# Altium PCB PCB2.PcbDoc (part 2 of 3)
Units mil, origin at the board's own origin, x right, y up, seen from the top; angles counter-clockwise.
Board outline 6000 x 4000 mil, 2 copper layers (Top Layer, Bottom Layer); 202 components, 201 nets, 407 pads, 100 vias.
Unrouted connection lines stored in the file: 105.
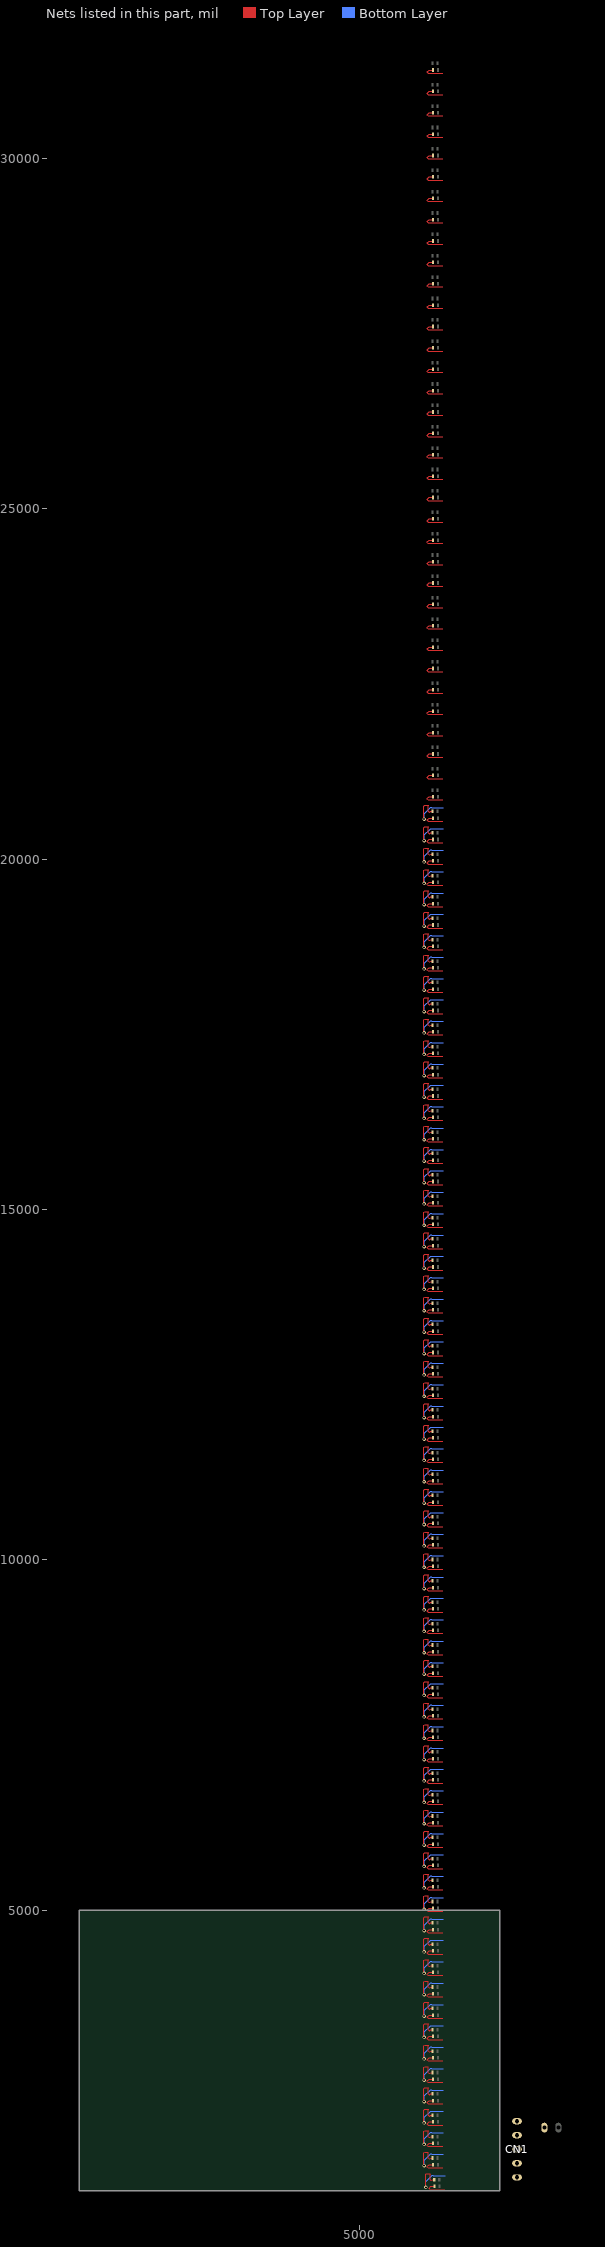
[diagram p2: the nets of this part, all layers, seen from the top]

## Part data
CN1: "Terminal Block"
CN?: library part TB-02, "Terminal Block"
D1_Out1 D1_Out2 D1_Out3 D1_Out4 D1_Out5 D1_Out6 D1_Out7 D1_Out8 D1_Out9 D1_Out10 D1_Out11 D1_Out12 D1_Out13 D1_Out14 D1_Out15 D1_Out16 D1_Out17 D1_Out18 D1_Out19 D1_Out20 D1_Out21 D1_Out22 D1_Out23 D1_Out24 D1_Out25 D1_Out26 D1_Out27 D1_Out28 D1_Out29 D1_Out30 D1_Out31 D1_Out32 D1_Out33 D1_Out34 D1_Out35 D1_Out36 D1_Out37 D1_Out38 D1_Out39 D1_Out40 D1_Out41 D1_Out42 D1_Out43 D1_Out44 D1_Out45 D1_Out46 D1_Out47 D1_Out48 D1_Out49 D1_Out50 D1_Out51 D1_Out52 D1_Out53 D1_Out54 D1_Out55 D1_Out56 D1_Out57 D1_Out58 D1_Out59 D1_Out60 D1_Out61 D1_Out62 D1_Out63 D1_Out64 D1_Out65 D1_Out66 D1_Out67 D1_Out68 D1_Out69 D1_Out70 D1_Out71 D1_Out72 D1_Out73 D1_Out74 D1_Out75 D1_Out76 D1_Out77 D1_Out78 D1_Out79 D1_Out80 D1_Out81 D1_Out82 D1_Out83 D1_Out84 D1_Out85 D1_Out86 D1_Out87 D1_Out88 D1_Out89 D1_Out90 D1_Out91 D1_Out92 D1_Out93 D1_Out94 D1_Out95 D1_Out96 D1_Out97 D1_Out98 D1_Out99 D1_Out100: "LED - Light-Emitting Diode"
R1_Out1 R1_Out2 R1_Out3 R1_Out4 R1_Out5 R1_Out6 R1_Out7 R1_Out8 R1_Out9 R1_Out10 R1_Out11 R1_Out12 R1_Out13 R1_Out14 R1_Out15 R1_Out16 R1_Out17 R1_Out18 R1_Out19 R1_Out20 R1_Out21 R1_Out22 R1_Out23 R1_Out24 R1_Out25 R1_Out26 R1_Out27 R1_Out28 R1_Out29 R1_Out30 R1_Out31 R1_Out32 R1_Out33 R1_Out34 R1_Out35 R1_Out36 R1_Out37 R1_Out38 R1_Out39 R1_Out40 R1_Out41 R1_Out42 R1_Out43 R1_Out44 R1_Out45 R1_Out46 R1_Out47 R1_Out48 R1_Out49 R1_Out50 R1_Out51 R1_Out52 R1_Out53 R1_Out54 R1_Out55 R1_Out56 R1_Out57 R1_Out58 R1_Out59 R1_Out60 R1_Out61 R1_Out62 R1_Out63 R1_Out64 R1_Out65 R1_Out66 R1_Out67 R1_Out68 R1_Out69 R1_Out70 R1_Out71 R1_Out72 R1_Out73 R1_Out74 R1_Out75 R1_Out76 R1_Out77 R1_Out78 R1_Out79 R1_Out80 R1_Out81 R1_Out82 R1_Out83 R1_Out84 R1_Out85 R1_Out86 R1_Out87 R1_Out88 R1_Out89 R1_Out90 R1_Out91 R1_Out92 R1_Out93 R1_Out94 R1_Out95 R1_Out96 R1_Out97 R1_Out98 R1_Out99 R1_Out100: library part Resistor, "Single resistor", Power=0.125W, Unit price=0.1

## Via types
v1: diameter 50, hole 28, Top Layer to Bottom Layer, 100 vias

## Nets (pads, with @x,y where several pads share a name; then routed paths per layer and width w, separated by ;. In a path a pad name is that pad's centre, name@x,y a point inside that pad or via, vN(x,y) a via of type N, cw(c..) or ccw(c..) an arc to the next point about the centre after c; other vN are vias at no path point)
GND: CN?.1 D1_Out1.1 D1_Out2.1 D1_Out3.1 D1_Out4.1 D1_Out5.1 D1_Out6.1 D1_Out7.1 D1_Out8.1 D1_Out9.1 D1_Out10.1 D1_Out11.1 D1_Out12.1 D1_Out13.1 D1_Out14.1 D1_Out15.1 D1_Out16.1 D1_Out17.1 D1_Out18.1 D1_Out19.1 D1_Out20.1 D1_Out21.1 D1_Out22.1 D1_Out23.1 D1_Out24.1 D1_Out25.1 D1_Out26.1 D1_Out27.1 D1_Out28.1 D1_Out29.1 D1_Out30.1 D1_Out31.1 D1_Out32.1 D1_Out33.1 D1_Out34.1 D1_Out35.1 D1_Out36.1 D1_Out37.1 D1_Out38.1 D1_Out39.1 D1_Out40.1 D1_Out41.1 D1_Out42.1 D1_Out43.1 D1_Out44.1 D1_Out45.1 D1_Out46.1 D1_Out47.1 D1_Out48.1 D1_Out49.1 D1_Out50.1 D1_Out51.1 D1_Out52.1 D1_Out53.1 D1_Out54.1 D1_Out55.1 D1_Out56.1 D1_Out57.1 D1_Out58.1 D1_Out59.1 D1_Out60.1 D1_Out61.1 D1_Out62.1 D1_Out63.1 D1_Out64.1 D1_Out65.1 D1_Out66.1 D1_Out67.1 D1_Out68.1 D1_Out69.1 D1_Out70.1 D1_Out71.1 D1_Out72.1 D1_Out73.1 D1_Out74.1 D1_Out75.1 D1_Out76.1 D1_Out77.1 D1_Out78.1 D1_Out79.1 D1_Out80.1 D1_Out81.1 D1_Out82.1 D1_Out83.1 D1_Out84.1 D1_Out85.1 D1_Out86.1 D1_Out87.1 D1_Out88.1 D1_Out89.1 D1_Out90.1 D1_Out91.1 D1_Out92.1 D1_Out93.1 D1_Out94.1 D1_Out95.1 D1_Out96.1 D1_Out97.1 D1_Out98.1 D1_Out99.1 D1_Out100.1 | length 32262.6
  Top Layer w10: D1_Out2.1@6044.57,1370 5990.43,1370 5965.43,1345 5965.43,1336.72 5977.15,1325 6185.43,1325 ; D1_Out3.1@6044.57,1675 5990.43,1675 5965.43,1650 5965.43,1641.72 5977.15,1630 6185.43,1630 ; D1_Out4.1@6044.57,1980 5990.43,1980 5965.43,1955 5965.43,1946.72 5977.15,1935 6185.43,1935 ; D1_Out5.1@6044.57,2285 5990.43,2285 5965.43,2260 5965.43,2251.72 5977.15,2240 6185.43,2240 ; D1_Out6.1@6044.57,2590 5990.43,2590 5965.43,2565 5965.43,2556.72 5977.15,2545 6185.43,2545 ; D1_Out7.1@6044.57,2895 5990.43,2895 5965.43,2870 5965.43,2861.72 5977.15,2850 6185.43,2850 ; D1_Out8.1@6044.57,3200 5990.43,3200 5965.43,3175 5965.43,3166.72 5977.15,3155 6185.43,3155 ; D1_Out9.1@6044.57,3505 5990.43,3505 5965.43,3480 5965.43,3471.72 5977.15,3460 6185.43,3460 ; D1_Out10.1@6044.57,3810 5990.43,3810 5965.43,3785 5965.43,3776.72 5977.15,3765 6185.43,3765 ; D1_Out11.1@6044.57,4115 5990.43,4115 5965.43,4090 5965.43,4081.72 5977.15,4070 6185.43,4070 ; D1_Out12.1@6044.57,4420 5990.43,4420 5965.43,4395 5965.43,4386.72 5977.15,4375 6185.43,4375 ; D1_Out13.1@6044.57,4725 5990.43,4725 5965.43,4700 5965.43,4691.72 5977.15,4680 6185.43,4680 ; D1_Out14.1@6044.57,5030 5990.43,5030 5965.43,5005 5965.43,4996.72 5977.15,4985 6185.43,4985 ; D1_Out15.1@6044.57,5335 5990.43,5335 5965.43,5310 5965.43,5301.72 5977.15,5290 6185.43,5290 ; D1_Out16.1@6044.57,5640 5990.43,5640 5965.43,5615 5965.43,5606.72 5977.15,5595 6185.43,5595 ; D1_Out17.1@6044.57,5945 5990.43,5945 5965.43,5920 5965.43,5911.72 5977.15,5900 6185.43,5900 ; D1_Out18.1@6044.57,6250 5990.43,6250 5965.43,6225 5965.43,6216.72 5977.15,6205 6185.43,6205 ; D1_Out19.1@6044.57,6555 5990.43,6555 5965.43,6530 5965.43,6521.72 5977.15,6510 6185.43,6510 ; D1_Out20.1@6044.57,6860 5990.43,6860 5965.43,6835 5965.43,6826.72 5977.15,6815 6185.43,6815 ; D1_Out21.1@6044.57,7165 5990.43,7165 5965.43,7140 5965.43,7131.72 5977.15,7120 6185.43,7120 ; D1_Out22.1@6044.57,7470 5990.43,7470 5965.43,7445 5965.43,7436.72 5977.15,7425 6185.43,7425 ; D1_Out23.1@6044.57,7775 5990.43,7775 5965.43,7750 5965.43,7741.72 5977.15,7730 6185.43,7730 ; D1_Out24.1@6044.57,8080 5990.43,8080 5965.43,8055 5965.43,8046.72 5977.15,8035 6185.43,8035 ; D1_Out25.1@6044.57,8385 5990.43,8385 5965.43,8360 5965.43,8351.72 5977.15,8340 6185.43,8340 ; D1_Out26.1@6044.57,8690 5990.43,8690 5965.43,8665 5965.43,8656.72 5977.15,8645 6185.43,8645 ; D1_Out27.1@6044.57,8995 5990.43,8995 5965.43,8970 5965.43,8961.72 5977.15,8950 6185.43,8950 ; D1_Out28.1@6044.57,9300 5990.43,9300 5965.43,9275 5965.43,9266.72 5977.15,9255 6185.43,9255 ; D1_Out29.1@6044.57,9605 5990.43,9605 5965.43,9580 5965.43,9571.72 5977.15,9560 6185.43,9560 ; D1_Out30.1@6044.57,9910 5990.43,9910 5965.43,9885 5965.43,9876.72 5977.15,9865 6185.43,9865 ; D1_Out31.1@6044.57,10215 5990.43,10215 5965.43,10190 5965.43,10181.72 5977.15,10170 6185.43,10170 ; D1_Out32.1@6044.57,10520 5990.43,10520 5965.43,10495 5965.43,10486.72 5977.15,10475 6185.43,10475 ; D1_Out33.1@6044.57,10825 5990.43,10825 5965.43,10800 5965.43,10791.72 5977.15,10780 6185.43,10780 ; D1_Out34.1@6044.57,11130 5990.43,11130 5965.43,11105 5965.43,11096.72 5977.15,11085 6185.43,11085 ; D1_Out35.1@6044.57,11435 5990.43,11435 5965.43,11410 5965.43,11401.72 5977.15,11390 6185.43,11390 ; D1_Out36.1@6044.57,11740 5990.43,11740 5965.43,11715 5965.43,11706.72 5977.15,11695 6185.43,11695 ; D1_Out37.1@6044.57,12045 5990.43,12045 5965.43,12020 5965.43,12011.72 5977.15,12000 6185.43,12000 ; D1_Out38.1@6044.57,12350 5990.43,12350 5965.43,12325 5965.43,12316.72 5977.15,12305 6185.43,12305 ; D1_Out39.1@6044.57,12655 5990.43,12655 5965.43,12630 5965.43,12621.72 5977.15,12610 6185.43,12610 ; D1_Out40.1@6044.57,12960 5990.43,12960 5965.43,12935 5965.43,12926.72 5977.15,12915 6185.43,12915 ; D1_Out41.1@6044.57,13265 5990.43,13265 5965.43,13240 5965.43,13231.72 5977.15,13220 6185.43,13220 ; D1_Out42.1@6044.57,13570 5990.43,13570 5965.43,13545 5965.43,13536.72 5977.15,13525 6185.43,13525 ; D1_Out43.1@6044.57,13875 5990.43,13875 5965.43,13850 5965.43,13841.72 5977.15,13830 6185.43,13830 ; D1_Out44.1@6044.57,14180 5990.43,14180 5965.43,14155 5965.43,14146.72 5977.15,14135 6185.43,14135 ; D1_Out45.1@6044.57,14485 5990.43,14485 5965.43,14460 5965.43,14451.72 5977.15,14440 6185.43,14440 ; D1_Out46.1@6044.57,14790 5990.43,14790 5965.43,14765 5965.43,14756.72 5977.15,14745 6185.43,14745 ; D1_Out47.1@6044.57,15095 5990.43,15095 5965.43,15070 5965.43,15061.72 5977.15,15050 6185.43,15050 ; D1_Out48.1@6044.57,15400 5990.43,15400 5965.43,15375 5965.43,15366.72 5977.15,15355 6185.43,15355 ; D1_Out49.1@6044.57,15705 5990.43,15705 5965.43,15680 5965.43,15671.72 5977.15,15660 6185.43,15660 ; D1_Out50.1@6044.57,16010 5990.43,16010 5965.43,15985 5965.43,15976.72 5977.15,15965 6185.43,15965 ; D1_Out51.1@6044.57,16315 5990.43,16315 5965.43,16290 5965.43,16281.72 5977.15,16270 6185.43,16270 ; D1_Out52.1@6044.57,16620 5990.43,16620 5965.43,16595 5965.43,16586.72 5977.15,16575 6185.43,16575 ; D1_Out53.1@6044.57,16925 5990.43,16925 5965.43,16900 5965.43,16891.72 5977.15,16880 6185.43,16880 ; D1_Out54.1@6044.57,17230 5990.43,17230 5965.43,17205 5965.43,17196.72 5977.15,17185 6185.43,17185 ; D1_Out55.1@6044.57,17535 5990.43,17535 5965.43,17510 5965.43,17501.72 5977.15,17490 6185.43,17490 ; D1_Out56.1@6044.57,17840 5990.43,17840 5965.43,17815 5965.43,17806.72 5977.15,17795 6185.43,17795 ; D1_Out57.1@6044.57,18145 5990.43,18145 5965.43,18120 5965.43,18111.72 5977.15,18100 6185.43,18100 ; D1_Out58.1@6044.57,18450 5990.43,18450 5965.43,18425 5965.43,18416.72 5977.15,18405 6185.43,18405 ; D1_Out59.1@6044.57,18755 5990.43,18755 5965.43,18730 5965.43,18721.72 5977.15,18710 6185.43,18710 ; D1_Out60.1@6044.57,19060 5990.43,19060 5965.43,19035 5965.43,19026.72 5977.15,19015 6185.43,19015 ; D1_Out61.1@6044.57,19365 5990.43,19365 5965.43,19340 5965.43,19331.72 5977.15,19320 6185.43,19320 ; D1_Out62.1@6044.57,19670 5990.43,19670 5965.43,19645 5965.43,19636.72 5977.15,19625 6185.43,19625 ; D1_Out63.1@6044.57,19975 5990.43,19975 5965.43,19950 5965.43,19941.72 5977.15,19930 6185.43,19930 ; D1_Out64.1@6044.57,20280 5990.43,20280 5965.43,20255 5965.43,20246.72 5977.15,20235 6185.43,20235 ; D1_Out65.1@6044.57,20585 5990.43,20585 5965.43,20560 5965.43,20551.72 5977.15,20540 6185.43,20540 ; D1_Out66.1@6044.57,20890 5990.43,20890 5965.43,20865 5965.43,20856.72 5977.15,20845 6185.43,20845 ; D1_Out67.1@6044.57,21195 5990.43,21195 5965.43,21170 5965.43,21161.72 5977.15,21150 6185.43,21150 ; D1_Out68.1@6044.57,21500 5990.43,21500 5965.43,21475 5965.43,21466.72 5977.15,21455 6185.43,21455 ; D1_Out69.1@6044.57,21805 5990.43,21805 5965.43,21780 5965.43,21771.72 5977.15,21760 6185.43,21760 ; D1_Out70.1@6044.57,22110 5990.43,22110 5965.43,22085 5965.43,22076.72 5977.15,22065 6185.43,22065 ; D1_Out71.1@6044.57,22415 5990.43,22415 5965.43,22390 5965.43,22381.72 5977.15,22370 6185.43,22370 ; D1_Out72.1@6044.57,22720 5990.43,22720 5965.43,22695 5965.43,22686.72 5977.15,22675 6185.43,22675 ; D1_Out73.1@6044.57,23025 5990.43,23025 5965.43,23000 5965.43,22991.72 5977.15,22980 6185.43,22980 ; D1_Out74.1@6044.57,23330 5990.43,23330 5965.43,23305 5965.43,23296.72 5977.15,23285 6185.43,23285 ; D1_Out75.1@6044.57,23635 5990.43,23635 5965.43,23610 5965.43,23601.72 5977.15,23590 6185.43,23590 ; D1_Out76.1@6044.57,23940 5990.43,23940 5965.43,23915 5965.43,23906.72 5977.15,23895 6185.43,23895 ; D1_Out77.1@6044.57,24245 5990.43,24245 5965.43,24220 5965.43,24211.72 5977.15,24200 6185.43,24200 ; D1_Out78.1@6044.57,24550 5990.43,24550 5965.43,24525 5965.43,24516.72 5977.15,24505 6185.43,24505 ; D1_Out79.1@6044.57,24855 5990.43,24855 5965.43,24830 5965.43,24821.72 5977.15,24810 6185.43,24810 ; D1_Out80.1@6044.57,25160 5990.43,25160 5965.43,25135 5965.43,25126.72 5977.15,25115 6185.43,25115 ; D1_Out81.1@6044.57,25465 5990.43,25465 5965.43,25440 5965.43,25431.72 5977.15,25420 6185.43,25420 ; D1_Out82.1@6044.57,25770 5990.43,25770 5965.43,25745 5965.43,25736.72 5977.15,25725 6185.43,25725 ; D1_Out83.1@6044.57,26075 5990.43,26075 5965.43,26050 5965.43,26041.72 5977.15,26030 6185.43,26030 ; D1_Out84.1@6044.57,26380 5990.43,26380 5965.43,26355 5965.43,26346.72 5977.15,26335 6185.43,26335 ; D1_Out85.1@6044.57,26685 5990.43,26685 5965.43,26660 5965.43,26651.72 5977.15,26640 6185.43,26640 ; D1_Out86.1@6044.57,26990 5990.43,26990 5965.43,26965 5965.43,26956.72 5977.15,26945 6185.43,26945 ; D1_Out87.1@6044.57,27295 5990.43,27295 5965.43,27270 5965.43,27261.72 5977.15,27250 6185.43,27250 ; D1_Out88.1@6044.57,27600 5990.43,27600 5965.43,27575 5965.43,27566.72 5977.15,27555 6185.43,27555 ; D1_Out89.1@6044.57,27905 5990.43,27905 5965.43,27880 5965.43,27871.72 5977.15,27860 6185.43,27860 ; D1_Out90.1@6044.57,28210 5990.43,28210 5965.43,28185 5965.43,28176.72 5977.15,28165 6185.43,28165 ; D1_Out91.1@6044.57,28515 5990.43,28515 5965.43,28490 5965.43,28481.72 5977.15,28470 6185.43,28470 ; D1_Out92.1@6044.57,28820 5990.43,28820 5965.43,28795 5965.43,28786.72 5977.15,28775 6185.43,28775 ; D1_Out93.1@6044.57,29125 5990.43,29125 5965.43,29100 5965.43,29091.72 5977.15,29080 6185.43,29080 ; D1_Out94.1@6044.57,29430 5990.43,29430 5965.43,29405 5965.43,29396.72 5977.15,29385 6185.43,29385 ; D1_Out95.1@6044.57,29735 5990.43,29735 5965.43,29710 5965.43,29701.72 5977.15,29690 6185.43,29690 ; D1_Out96.1@6044.57,30040 5990.43,30040 5965.43,30015 5965.43,30006.72 5977.15,29995 6185.43,29995 ; D1_Out97.1@6044.57,30345 5990.43,30345 5965.43,30320 5965.43,30311.72 5977.15,30300 6185.43,30300 ; D1_Out98.1@6044.57,30650 5990.43,30650 5965.43,30625 5965.43,30616.72 5977.15,30605 6185.43,30605 ; D1_Out99.1@6044.57,30955 5990.43,30955 5965.43,30930 5965.43,30921.72 5977.15,30910 6185.43,30910 ; D1_Out100.1@6044.57,31260 5990.43,31260 5965.43,31235 5965.43,31226.72 5977.15,31215 6185.43,31215 ; D1_Out1.1@6069.13,1060 6015,1060 5990,1035 5990,1026.72 6001.72,1015 6210,1015
IN1: CN1.5 R1_Out1.2 | length 801
  Top Layer w10: v1(5945,1045) 5940,1050 5940,1230 5950,1240 5999.14,1240 6005,1234.14 6005,1155 6015.86,1144.14 6024.14,1144.14 6035,1155 R1_Out1.2@6064.13,1155
  Bottom Layer w10: v1(5945,1045) 5945,1125 6035.86,1215.86 6044.14,1215.86 6050,1210 6220,1210
IN2: CN1.4 R1_Out2.2 | length 801
  Top Layer w10: v1(5920.43,1355) 5915.43,1360 5915.43,1540 5925.43,1550 5974.58,1550 5980.43,1544.14 5980.43,1465 5991.29,1454.14 5999.58,1454.14 6010.43,1465 R1_Out2.2@6039.57,1465
  Bottom Layer w10: v1(5920.43,1355) 5920.43,1435 6011.29,1525.86 6019.58,1525.86 6025.43,1520 6195.43,1520
IN3: CN1.3 R1_Out3.2 | length 801
  Top Layer w10: v1(5920.43,1660) 5915.43,1665 5915.43,1845 5925.43,1855 5974.58,1855 5980.43,1849.14 5980.43,1770 5991.29,1759.14 5999.58,1759.14 6010.43,1770 R1_Out3.2@6039.57,1770
  Bottom Layer w10: v1(5920.43,1660) 5920.43,1740 6011.29,1830.86 6019.58,1830.86 6025.43,1825 6195.43,1825
IN4: CN1.2 R1_Out4.2 | length 801
  Top Layer w10: v1(5920.43,1965) 5915.43,1970 5915.43,2150 5925.43,2160 5974.58,2160 5980.43,2154.14 5980.43,2075 5991.29,2064.14 5999.58,2064.14 6010.43,2075 R1_Out4.2@6039.57,2075
  Bottom Layer w10: v1(5920.43,1965) 5920.43,2045 6011.29,2135.86 6019.58,2135.86 6025.43,2130 6195.43,2130
IN5: CN1.1 R1_Out5.2 | length 801
  Top Layer w10: v1(5920.43,2270) 5915.43,2275 5915.43,2455 5925.43,2465 5974.58,2465 5980.43,2459.14 5980.43,2380 5991.29,2369.14 5999.58,2369.14 6010.43,2380 R1_Out5.2@6039.57,2380
  Bottom Layer w10: v1(5920.43,2270) 5920.43,2350 6011.29,2440.86 6019.58,2440.86 6025.43,2435 6195.43,2435
IN6: R1_Out6.2 | length 801
  Top Layer w10: v1(5920.43,2575) 5915.43,2580 5915.43,2760 5925.43,2770 5974.58,2770 5980.43,2764.14 5980.43,2685 5991.29,2674.14 5999.58,2674.14 6010.43,2685 R1_Out6.2@6039.57,2685
  Bottom Layer w10: v1(5920.43,2575) 5920.43,2655 6011.29,2745.86 6019.58,2745.86 6025.43,2740 6195.43,2740
IN7: R1_Out7.2 | length 801
  Top Layer w10: v1(5920.43,2880) 5915.43,2885 5915.43,3065 5925.43,3075 5974.58,3075 5980.43,3069.14 5980.43,2990 5991.29,2979.14 5999.58,2979.14 6010.43,2990 R1_Out7.2@6039.57,2990
  Bottom Layer w10: v1(5920.43,2880) 5920.43,2960 6011.29,3050.86 6019.58,3050.86 6025.43,3045 6195.43,3045
IN8: R1_Out8.2 | length 801
  Top Layer w10: v1(5920.43,3185) 5915.43,3190 5915.43,3370 5925.43,3380 5974.58,3380 5980.43,3374.14 5980.43,3295 5991.29,3284.14 5999.58,3284.14 6010.43,3295 R1_Out8.2@6039.57,3295
  Bottom Layer w10: v1(5920.43,3185) 5920.43,3265 6011.29,3355.86 6019.58,3355.86 6025.43,3350 6195.43,3350
IN9: R1_Out9.2 | length 801
  Top Layer w10: v1(5920.43,3490) 5915.43,3495 5915.43,3675 5925.43,3685 5974.58,3685 5980.43,3679.14 5980.43,3600 5991.29,3589.14 5999.58,3589.14 6010.43,3600 R1_Out9.2@6039.57,3600
  Bottom Layer w10: v1(5920.43,3490) 5920.43,3570 6011.29,3660.86 6019.58,3660.86 6025.43,3655 6195.43,3655
IN10: R1_Out10.2 | length 801
  Top Layer w10: v1(5920.43,3795) 5915.43,3800 5915.43,3980 5925.43,3990 5974.58,3990 5980.43,3984.14 5980.43,3905 5991.29,3894.14 5999.58,3894.14 6010.43,3905 R1_Out10.2@6039.57,3905
  Bottom Layer w10: v1(5920.43,3795) 5920.43,3875 6011.29,3965.86 6019.58,3965.86 6025.43,3960 6195.43,3960
IN11: R1_Out11.2 | length 801
  Top Layer w10: v1(5920.43,4100) 5915.43,4105 5915.43,4285 5925.43,4295 5974.58,4295 5980.43,4289.14 5980.43,4210 5991.29,4199.14 5999.58,4199.14 6010.43,4210 R1_Out11.2@6039.57,4210
  Bottom Layer w10: v1(5920.43,4100) 5920.43,4180 6011.29,4270.86 6019.58,4270.86 6025.43,4265 6195.43,4265
IN12: R1_Out12.2 | length 801
  Top Layer w10: v1(5920.43,4405) 5915.43,4410 5915.43,4590 5925.43,4600 5974.58,4600 5980.43,4594.14 5980.43,4515 5991.29,4504.14 5999.58,4504.14 6010.43,4515 R1_Out12.2@6039.57,4515
  Bottom Layer w10: v1(5920.43,4405) 5920.43,4485 6011.29,4575.86 6019.58,4575.86 6025.43,4570 6195.43,4570
IN13: R1_Out13.2 | length 801
  Top Layer w10: v1(5920.43,4710) 5915.43,4715 5915.43,4895 5925.43,4905 5974.58,4905 5980.43,4899.14 5980.43,4820 5991.29,4809.14 5999.58,4809.14 6010.43,4820 R1_Out13.2@6039.57,4820
  Bottom Layer w10: v1(5920.43,4710) 5920.43,4790 6011.29,4880.86 6019.58,4880.86 6025.43,4875 6195.43,4875
IN14: R1_Out14.2 | length 801
  Top Layer w10: v1(5920.43,5015) 5915.43,5020 5915.43,5200 5925.43,5210 5974.58,5210 5980.43,5204.14 5980.43,5125 5991.29,5114.14 5999.58,5114.14 6010.43,5125 R1_Out14.2@6039.57,5125
  Bottom Layer w10: v1(5920.43,5015) 5920.43,5095 6011.29,5185.86 6019.58,5185.86 6025.43,5180 6195.43,5180
IN15: R1_Out15.2 | length 801
  Top Layer w10: v1(5920.43,5320) 5915.43,5325 5915.43,5505 5925.43,5515 5974.58,5515 5980.43,5509.14 5980.43,5430 5991.29,5419.14 5999.58,5419.14 6010.43,5430 R1_Out15.2@6039.57,5430
  Bottom Layer w10: v1(5920.43,5320) 5920.43,5400 6011.29,5490.86 6019.58,5490.86 6025.43,5485 6195.43,5485
IN16: R1_Out16.2 | length 801
  Top Layer w10: v1(5920.43,5625) 5915.43,5630 5915.43,5810 5925.43,5820 5974.58,5820 5980.43,5814.14 5980.43,5735 5991.29,5724.14 5999.58,5724.14 6010.43,5735 R1_Out16.2@6039.57,5735
  Bottom Layer w10: v1(5920.43,5625) 5920.43,5705 6011.29,5795.86 6019.58,5795.86 6025.43,5790 6195.43,5790
IN17: R1_Out17.2 | length 801
  Top Layer w10: v1(5920.43,5930) 5915.43,5935 5915.43,6115 5925.43,6125 5974.58,6125 5980.43,6119.14 5980.43,6040 5991.29,6029.14 5999.58,6029.14 6010.43,6040 R1_Out17.2@6039.57,6040
  Bottom Layer w10: v1(5920.43,5930) 5920.43,6010 6011.29,6100.86 6019.58,6100.86 6025.43,6095 6195.43,6095
IN18: R1_Out18.2 | length 801
  Top Layer w10: v1(5920.43,6235) 5915.43,6240 5915.43,6420 5925.43,6430 5974.58,6430 5980.43,6424.14 5980.43,6345 5991.29,6334.14 5999.58,6334.14 6010.43,6345 R1_Out18.2@6039.57,6345
  Bottom Layer w10: v1(5920.43,6235) 5920.43,6315 6011.29,6405.86 6019.58,6405.86 6025.43,6400 6195.43,6400
IN19: R1_Out19.2 | length 801
  Top Layer w10: v1(5920.43,6540) 5915.43,6545 5915.43,6725 5925.43,6735 5974.58,6735 5980.43,6729.14 5980.43,6650 5991.29,6639.14 5999.58,6639.14 6010.43,6650 R1_Out19.2@6039.57,6650
  Bottom Layer w10: v1(5920.43,6540) 5920.43,6620 6011.29,6710.86 6019.58,6710.86 6025.43,6705 6195.43,6705
IN20: R1_Out20.2 | length 801
  Top Layer w10: v1(5920.43,6845) 5915.43,6850 5915.43,7030 5925.43,7040 5974.58,7040 5980.43,7034.14 5980.43,6955 5991.29,6944.14 5999.58,6944.14 6010.43,6955 R1_Out20.2@6039.57,6955
  Bottom Layer w10: v1(5920.43,6845) 5920.43,6925 6011.29,7015.86 6019.58,7015.86 6025.43,7010 6195.43,7010
IN21: R1_Out21.2 | length 801
  Top Layer w10: v1(5920.43,7150) 5915.43,7155 5915.43,7335 5925.43,7345 5974.58,7345 5980.43,7339.14 5980.43,7260 5991.29,7249.14 5999.58,7249.14 6010.43,7260 R1_Out21.2@6039.57,7260
  Bottom Layer w10: v1(5920.43,7150) 5920.43,7230 6011.29,7320.86 6019.58,7320.86 6025.43,7315 6195.43,7315
IN22: R1_Out22.2 | length 801
  Top Layer w10: v1(5920.43,7455) 5915.43,7460 5915.43,7640 5925.43,7650 5974.58,7650 5980.43,7644.14 5980.43,7565 5991.29,7554.14 5999.58,7554.14 6010.43,7565 R1_Out22.2@6039.57,7565
  Bottom Layer w10: v1(5920.43,7455) 5920.43,7535 6011.29,7625.86 6019.58,7625.86 6025.43,7620 6195.43,7620
IN23: R1_Out23.2 | length 801
  Top Layer w10: v1(5920.43,7760) 5915.43,7765 5915.43,7945 5925.43,7955 5974.58,7955 5980.43,7949.14 5980.43,7870 5991.29,7859.14 5999.58,7859.14 6010.43,7870 R1_Out23.2@6039.57,7870
  Bottom Layer w10: v1(5920.43,7760) 5920.43,7840 6011.29,7930.86 6019.58,7930.86 6025.43,7925 6195.43,7925
IN24: R1_Out24.2 | length 801
  Top Layer w10: v1(5920.43,8065) 5915.43,8070 5915.43,8250 5925.43,8260 5974.58,8260 5980.43,8254.14 5980.43,8175 5991.29,8164.14 5999.58,8164.14 6010.43,8175 R1_Out24.2@6039.57,8175
  Bottom Layer w10: v1(5920.43,8065) 5920.43,8145 6011.29,8235.86 6019.58,8235.86 6025.43,8230 6195.43,8230
IN25: R1_Out25.2 | length 801
  Top Layer w10: v1(5920.43,8370) 5915.43,8375 5915.43,8555 5925.43,8565 5974.58,8565 5980.43,8559.14 5980.43,8480 5991.29,8469.14 5999.58,8469.14 6010.43,8480 R1_Out25.2@6039.57,8480
  Bottom Layer w10: v1(5920.43,8370) 5920.43,8450 6011.29,8540.86 6019.58,8540.86 6025.43,8535 6195.43,8535
IN26: R1_Out26.2 | length 801
  Top Layer w10: v1(5920.43,8675) 5915.43,8680 5915.43,8860 5925.43,8870 5974.58,8870 5980.43,8864.14 5980.43,8785 5991.29,8774.14 5999.58,8774.14 6010.43,8785 R1_Out26.2@6039.57,8785
  Bottom Layer w10: v1(5920.43,8675) 5920.43,8755 6011.29,8845.86 6019.58,8845.86 6025.43,8840 6195.43,8840
IN27: R1_Out27.2 | length 801
  Top Layer w10: v1(5920.43,8980) 5915.43,8985 5915.43,9165 5925.43,9175 5974.58,9175 5980.43,9169.14 5980.43,9090 5991.29,9079.14 5999.58,9079.14 6010.43,9090 R1_Out27.2@6039.57,9090
  Bottom Layer w10: v1(5920.43,8980) 5920.43,9060 6011.29,9150.86 6019.58,9150.86 6025.43,9145 6195.43,9145
IN28: R1_Out28.2 | length 801
  Top Layer w10: v1(5920.43,9285) 5915.43,9290 5915.43,9470 5925.43,9480 5974.58,9480 5980.43,9474.14 5980.43,9395 5991.29,9384.14 5999.58,9384.14 6010.43,9395 R1_Out28.2@6039.57,9395
  Bottom Layer w10: v1(5920.43,9285) 5920.43,9365 6011.29,9455.86 6019.58,9455.86 6025.43,9450 6195.43,9450
IN29: R1_Out29.2 | length 801
  Top Layer w10: v1(5920.43,9590) 5915.43,9595 5915.43,9775 5925.43,9785 5974.58,9785 5980.43,9779.14 5980.43,9700 5991.29,9689.14 5999.58,9689.14 6010.43,9700 R1_Out29.2@6039.57,9700
  Bottom Layer w10: v1(5920.43,9590) 5920.43,9670 6011.29,9760.86 6019.58,9760.86 6025.43,9755 6195.43,9755
IN30: R1_Out30.2 | length 801
  Top Layer w10: v1(5920.43,9895) 5915.43,9900 5915.43,10080 5925.43,10090 5974.58,10090 5980.43,10084.14 5980.43,10005 5991.29,9994.14 5999.58,9994.14 6010.43,10005 R1_Out30.2@6039.57,10005
  Bottom Layer w10: v1(5920.43,9895) 5920.43,9975 6011.29,10065.86 6019.58,10065.86 6025.43,10060 6195.43,10060
IN31: R1_Out31.2 | length 801
  Top Layer w10: v1(5920.43,10200) 5915.43,10205 5915.43,10385 5925.43,10395 5974.58,10395 5980.43,10389.14 5980.43,10310 5991.29,10299.14 5999.58,10299.14 6010.43,10310 R1_Out31.2@6039.57,10310
  Bottom Layer w10: v1(5920.43,10200) 5920.43,10280 6011.29,10370.86 6019.58,10370.86 6025.43,10365 6195.43,10365
IN32: R1_Out32.2 | length 801
  Top Layer w10: v1(5920.43,10505) 5915.43,10510 5915.43,10690 5925.43,10700 5974.58,10700 5980.43,10694.14 5980.43,10615 5991.29,10604.14 5999.58,10604.14 6010.43,10615 R1_Out32.2@6039.57,10615
  Bottom Layer w10: v1(5920.43,10505) 5920.43,10585 6011.29,10675.86 6019.58,10675.86 6025.43,10670 6195.43,10670
IN33: R1_Out33.2 | length 801
  Top Layer w10: v1(5920.43,10810) 5915.43,10815 5915.43,10995 5925.43,11005 5974.58,11005 5980.43,10999.14 5980.43,10920 5991.29,10909.14 5999.58,10909.14 6010.43,10920 R1_Out33.2@6039.57,10920
  Bottom Layer w10: v1(5920.43,10810) 5920.43,10890 6011.29,10980.86 6019.58,10980.86 6025.43,10975 6195.43,10975
IN34: R1_Out34.2 | length 801
  Top Layer w10: v1(5920.43,11115) 5915.43,11120 5915.43,11300 5925.43,11310 5974.58,11310 5980.43,11304.14 5980.43,11225 5991.29,11214.14 5999.58,11214.14 6010.43,11225 R1_Out34.2@6039.57,11225
  Bottom Layer w10: v1(5920.43,11115) 5920.43,11195 6011.29,11285.86 6019.58,11285.86 6025.43,11280 6195.43,11280
IN35: R1_Out35.2 | length 801
  Top Layer w10: v1(5920.43,11420) 5915.43,11425 5915.43,11605 5925.43,11615 5974.58,11615 5980.43,11609.14 5980.43,11530 5991.29,11519.14 5999.58,11519.14 6010.43,11530 R1_Out35.2@6039.57,11530
  Bottom Layer w10: v1(5920.43,11420) 5920.43,11500 6011.29,11590.86 6019.58,11590.86 6025.43,11585 6195.43,11585
IN36: R1_Out36.2 | length 801
  Top Layer w10: v1(5920.43,11725) 5915.43,11730 5915.43,11910 5925.43,11920 5974.58,11920 5980.43,11914.14 5980.43,11835 5991.29,11824.14 5999.58,11824.14 6010.43,11835 R1_Out36.2@6039.57,11835
  Bottom Layer w10: v1(5920.43,11725) 5920.43,11805 6011.29,11895.86 6019.58,11895.86 6025.43,11890 6195.43,11890
IN37: R1_Out37.2 | length 801
  Top Layer w10: v1(5920.43,12030) 5915.43,12035 5915.43,12215 5925.43,12225 5974.58,12225 5980.43,12219.14 5980.43,12140 5991.29,12129.14 5999.58,12129.14 6010.43,12140 R1_Out37.2@6039.57,12140
  Bottom Layer w10: v1(5920.43,12030) 5920.43,12110 6011.29,12200.86 6019.58,12200.86 6025.43,12195 6195.43,12195
IN38: R1_Out38.2 | length 801
  Top Layer w10: v1(5920.43,12335) 5915.43,12340 5915.43,12520 5925.43,12530 5974.58,12530 5980.43,12524.14 5980.43,12445 5991.29,12434.14 5999.58,12434.14 6010.43,12445 R1_Out38.2@6039.57,12445
  Bottom Layer w10: v1(5920.43,12335) 5920.43,12415 6011.29,12505.86 6019.58,12505.86 6025.43,12500 6195.43,12500
IN39: R1_Out39.2 | length 801
  Top Layer w10: v1(5920.43,12640) 5915.43,12645 5915.43,12825 5925.43,12835 5974.58,12835 5980.43,12829.14 5980.43,12750 5991.29,12739.14 5999.58,12739.14 6010.43,12750 R1_Out39.2@6039.57,12750
  Bottom Layer w10: v1(5920.43,12640) 5920.43,12720 6011.29,12810.86 6019.58,12810.86 6025.43,12805 6195.43,12805
IN40: R1_Out40.2 | length 801
  Top Layer w10: v1(5920.43,12945) 5915.43,12950 5915.43,13130 5925.43,13140 5974.58,13140 5980.43,13134.14 5980.43,13055 5991.29,13044.14 5999.58,13044.14 6010.43,13055 R1_Out40.2@6039.57,13055
  Bottom Layer w10: v1(5920.43,12945) 5920.43,13025 6011.29,13115.86 6019.58,13115.86 6025.43,13110 6195.43,13110
IN41: R1_Out41.2 | length 801
  Top Layer w10: v1(5920.43,13250) 5915.43,13255 5915.43,13435 5925.43,13445 5974.58,13445 5980.43,13439.14 5980.43,13360 5991.29,13349.14 5999.58,13349.14 6010.43,13360 R1_Out41.2@6039.57,13360
  Bottom Layer w10: v1(5920.43,13250) 5920.43,13330 6011.29,13420.86 6019.58,13420.86 6025.43,13415 6195.43,13415
IN42: R1_Out42.2 | length 801
  Top Layer w10: v1(5920.43,13555) 5915.43,13560 5915.43,13740 5925.43,13750 5974.58,13750 5980.43,13744.14 5980.43,13665 5991.29,13654.14 5999.58,13654.14 6010.43,13665 R1_Out42.2@6039.57,13665
  Bottom Layer w10: v1(5920.43,13555) 5920.43,13635 6011.29,13725.86 6019.58,13725.86 6025.43,13720 6195.43,13720
IN43: R1_Out43.2 | length 801
  Top Layer w10: v1(5920.43,13860) 5915.43,13865 5915.43,14045 5925.43,14055 5974.58,14055 5980.43,14049.14 5980.43,13970 5991.29,13959.14 5999.58,13959.14 6010.43,13970 R1_Out43.2@6039.57,13970
  Bottom Layer w10: v1(5920.43,13860) 5920.43,13940 6011.29,14030.86 6019.58,14030.86 6025.43,14025 6195.43,14025
IN44: R1_Out44.2 | length 801
  Top Layer w10: v1(5920.43,14165) 5915.43,14170 5915.43,14350 5925.43,14360 5974.58,14360 5980.43,14354.14 5980.43,14275 5991.29,14264.14 5999.58,14264.14 6010.43,14275 R1_Out44.2@6039.57,14275
  Bottom Layer w10: v1(5920.43,14165) 5920.43,14245 6011.29,14335.86 6019.58,14335.86 6025.43,14330 6195.43,14330
IN45: R1_Out45.2 | length 801
  Top Layer w10: v1(5920.43,14470) 5915.43,14475 5915.43,14655 5925.43,14665 5974.58,14665 5980.43,14659.14 5980.43,14580 5991.29,14569.14 5999.58,14569.14 6010.43,14580 R1_Out45.2@6039.57,14580
  Bottom Layer w10: v1(5920.43,14470) 5920.43,14550 6011.29,14640.86 6019.58,14640.86 6025.43,14635 6195.43,14635
IN46: R1_Out46.2 | length 801
  Top Layer w10: v1(5920.43,14775) 5915.43,14780 5915.43,14960 5925.43,14970 5974.58,14970 5980.43,14964.14 5980.43,14885 5991.29,14874.14 5999.58,14874.14 6010.43,14885 R1_Out46.2@6039.57,14885
  Bottom Layer w10: v1(5920.43,14775) 5920.43,14855 6011.29,14945.86 6019.58,14945.86 6025.43,14940 6195.43,14940
IN47: R1_Out47.2 | length 801
  Top Layer w10: v1(5920.43,15080) 5915.43,15085 5915.43,15265 5925.43,15275 5974.58,15275 5980.43,15269.14 5980.43,15190 5991.29,15179.14 5999.58,15179.14 6010.43,15190 R1_Out47.2@6039.57,15190
  Bottom Layer w10: v1(5920.43,15080) 5920.43,15160 6011.29,15250.86 6019.58,15250.86 6025.43,15245 6195.43,15245
IN48: R1_Out48.2 | length 801
  Top Layer w10: v1(5920.43,15385) 5915.43,15390 5915.43,15570 5925.43,15580 5974.58,15580 5980.43,15574.14 5980.43,15495 5991.29,15484.14 5999.58,15484.14 6010.43,15495 R1_Out48.2@6039.57,15495
  Bottom Layer w10: v1(5920.43,15385) 5920.43,15465 6011.29,15555.86 6019.58,15555.86 6025.43,15550 6195.43,15550
IN49: R1_Out49.2 | length 801
  Top Layer w10: v1(5920.43,15690) 5915.43,15695 5915.43,15875 5925.43,15885 5974.58,15885 5980.43,15879.14 5980.43,15800 5991.29,15789.14 5999.58,15789.14 6010.43,15800 R1_Out49.2@6039.57,15800
  Bottom Layer w10: v1(5920.43,15690) 5920.43,15770 6011.29,15860.86 6019.58,15860.86 6025.43,15855 6195.43,15855
IN50: R1_Out50.2 | length 801
  Top Layer w10: v1(5920.43,15995) 5915.43,16000 5915.43,16180 5925.43,16190 5974.58,16190 5980.43,16184.14 5980.43,16105 5991.29,16094.14 5999.58,16094.14 6010.43,16105 R1_Out50.2@6039.57,16105
  Bottom Layer w10: v1(5920.43,15995) 5920.43,16075 6011.29,16165.86 6019.58,16165.86 6025.43,16160 6195.43,16160
IN51: R1_Out51.2 | length 801
  Top Layer w10: v1(5920.43,16300) 5915.43,16305 5915.43,16485 5925.43,16495 5974.58,16495 5980.43,16489.14 5980.43,16410 5991.29,16399.14 5999.58,16399.14 6010.43,16410 R1_Out51.2@6039.57,16410
  Bottom Layer w10: v1(5920.43,16300) 5920.43,16380 6011.29,16470.86 6019.58,16470.86 6025.43,16465 6195.43,16465
IN52: R1_Out52.2 | length 801
  Top Layer w10: v1(5920.43,16605) 5915.43,16610 5915.43,16790 5925.43,16800 5974.58,16800 5980.43,16794.14 5980.43,16715 5991.29,16704.14 5999.58,16704.14 6010.43,16715 R1_Out52.2@6039.57,16715
  Bottom Layer w10: v1(5920.43,16605) 5920.43,16685 6011.29,16775.86 6019.58,16775.86 6025.43,16770 6195.43,16770
IN53: R1_Out53.2 | length 801
  Top Layer w10: v1(5920.43,16910) 5915.43,16915 5915.43,17095 5925.43,17105 5974.58,17105 5980.43,17099.14 5980.43,17020 5991.29,17009.14 5999.58,17009.14 6010.43,17020 R1_Out53.2@6039.57,17020
  Bottom Layer w10: v1(5920.43,16910) 5920.43,16990 6011.29,17080.86 6019.58,17080.86 6025.43,17075 6195.43,17075
IN54: R1_Out54.2 | length 801
  Top Layer w10: v1(5920.43,17215) 5915.43,17220 5915.43,17400 5925.43,17410 5974.58,17410 5980.43,17404.14 5980.43,17325 5991.29,17314.14 5999.58,17314.14 6010.43,17325 R1_Out54.2@6039.57,17325
  Bottom Layer w10: v1(5920.43,17215) 5920.43,17295 6011.29,17385.86 6019.58,17385.86 6025.43,17380 6195.43,17380
IN55: R1_Out55.2 | length 801
  Top Layer w10: v1(5920.43,17520) 5915.43,17525 5915.43,17705 5925.43,17715 5974.58,17715 5980.43,17709.14 5980.43,17630 5991.29,17619.14 5999.58,17619.14 6010.43,17630 R1_Out55.2@6039.57,17630
  Bottom Layer w10: v1(5920.43,17520) 5920.43,17600 6011.29,17690.86 6019.58,17690.86 6025.43,17685 6195.43,17685
IN56: R1_Out56.2 | length 801
  Top Layer w10: v1(5920.43,17825) 5915.43,17830 5915.43,18010 5925.43,18020 5974.58,18020 5980.43,18014.14 5980.43,17935 5991.29,17924.14 5999.58,17924.14 6010.43,17935 R1_Out56.2@6039.57,17935
  Bottom Layer w10: v1(5920.43,17825) 5920.43,17905 6011.29,17995.86 6019.58,17995.86 6025.43,17990 6195.43,17990
IN57: R1_Out57.2 | length 801
  Top Layer w10: v1(5920.43,18130) 5915.43,18135 5915.43,18315 5925.43,18325 5974.58,18325 5980.43,18319.14 5980.43,18240 5991.29,18229.14 5999.58,18229.14 6010.43,18240 R1_Out57.2@6039.57,18240
  Bottom Layer w10: v1(5920.43,18130) 5920.43,18210 6011.29,18300.86 6019.58,18300.86 6025.43,18295 6195.43,18295
IN58: R1_Out58.2 | length 801
  Top Layer w10: v1(5920.43,18435) 5915.43,18440 5915.43,18620 5925.43,18630 5974.58,18630 5980.43,18624.14 5980.43,18545 5991.29,18534.14 5999.58,18534.14 6010.43,18545 R1_Out58.2@6039.57,18545
  Bottom Layer w10: v1(5920.43,18435) 5920.43,18515 6011.29,18605.86 6019.58,18605.86 6025.43,18600 6195.43,18600
IN59: R1_Out59.2 | length 801
  Top Layer w10: v1(5920.43,18740) 5915.43,18745 5915.43,18925 5925.43,18935 5974.58,18935 5980.43,18929.14 5980.43,18850 5991.29,18839.14 5999.58,18839.14 6010.43,18850 R1_Out59.2@6039.57,18850
  Bottom Layer w10: v1(5920.43,18740) 5920.43,18820 6011.29,18910.86 6019.58,18910.86 6025.43,18905 6195.43,18905
IN60: R1_Out60.2 | length 801
  Top Layer w10: v1(5920.43,19045) 5915.43,19050 5915.43,19230 5925.43,19240 5974.58,19240 5980.43,19234.14 5980.43,19155 5991.29,19144.14 5999.58,19144.14 6010.43,19155 R1_Out60.2@6039.57,19155
  Bottom Layer w10: v1(5920.43,19045) 5920.43,19125 6011.29,19215.86 6019.58,19215.86 6025.43,19210 6195.43,19210
IN61: R1_Out61.2 | length 801
  Top Layer w10: v1(5920.43,19350) 5915.43,19355 5915.43,19535 5925.43,19545 5974.58,19545 5980.43,19539.14 5980.43,19460 5991.29,19449.14 5999.58,19449.14 6010.43,19460 R1_Out61.2@6039.57,19460
  Bottom Layer w10: v1(5920.43,19350) 5920.43,19430 6011.29,19520.86 6019.58,19520.86 6025.43,19515 6195.43,19515
IN62: R1_Out62.2 | length 801
  Top Layer w10: v1(5920.43,19655) 5915.43,19660 5915.43,19840 5925.43,19850 5974.58,19850 5980.43,19844.14 5980.43,19765 5991.29,19754.14 5999.58,19754.14 6010.43,19765 R1_Out62.2@6039.57,19765
  Bottom Layer w10: v1(5920.43,19655) 5920.43,19735 6011.29,19825.86 6019.58,19825.86 6025.43,19820 6195.43,19820
IN63: R1_Out63.2 | length 801
  Top Layer w10: v1(5920.43,19960) 5915.43,19965 5915.43,20145 5925.43,20155 5974.58,20155 5980.43,20149.14 5980.43,20070 5991.29,20059.14 5999.58,20059.14 6010.43,20070 R1_Out63.2@6039.57,20070
  Bottom Layer w10: v1(5920.43,19960) 5920.43,20040 6011.29,20130.86 6019.58,20130.86 6025.43,20125 6195.43,20125
IN64: R1_Out64.2 | length 801
  Top Layer w10: v1(5920.43,20265) 5915.43,20270 5915.43,20450 5925.43,20460 5974.58,20460 5980.43,20454.14 5980.43,20375 5991.29,20364.14 5999.58,20364.14 6010.43,20375 R1_Out64.2@6039.57,20375
  Bottom Layer w10: v1(5920.43,20265) 5920.43,20345 6011.29,20435.86 6019.58,20435.86 6025.43,20430 6195.43,20430
IN65: R1_Out65.2 | length 801
  Top Layer w10: v1(5920.43,20570) 5915.43,20575 5915.43,20755 5925.43,20765 5974.58,20765 5980.43,20759.14 5980.43,20680 5991.29,20669.14 5999.58,20669.14 6010.43,20680 R1_Out65.2@6039.57,20680
  Bottom Layer w10: v1(5920.43,20570) 5920.43,20650 6011.29,20740.86 6019.58,20740.86 6025.43,20735 6195.43,20735